# Altium PCB Board Sensor - Part2.PcbDoc
Units mm, origin at the board's own origin, x right, y up, seen from the top; angles counter-clockwise.
Board outline 327 x 231 mm, 2 copper layers (Top Layer, Bottom Layer); 32 components, 0 nets, 152 pads, 0 vias.
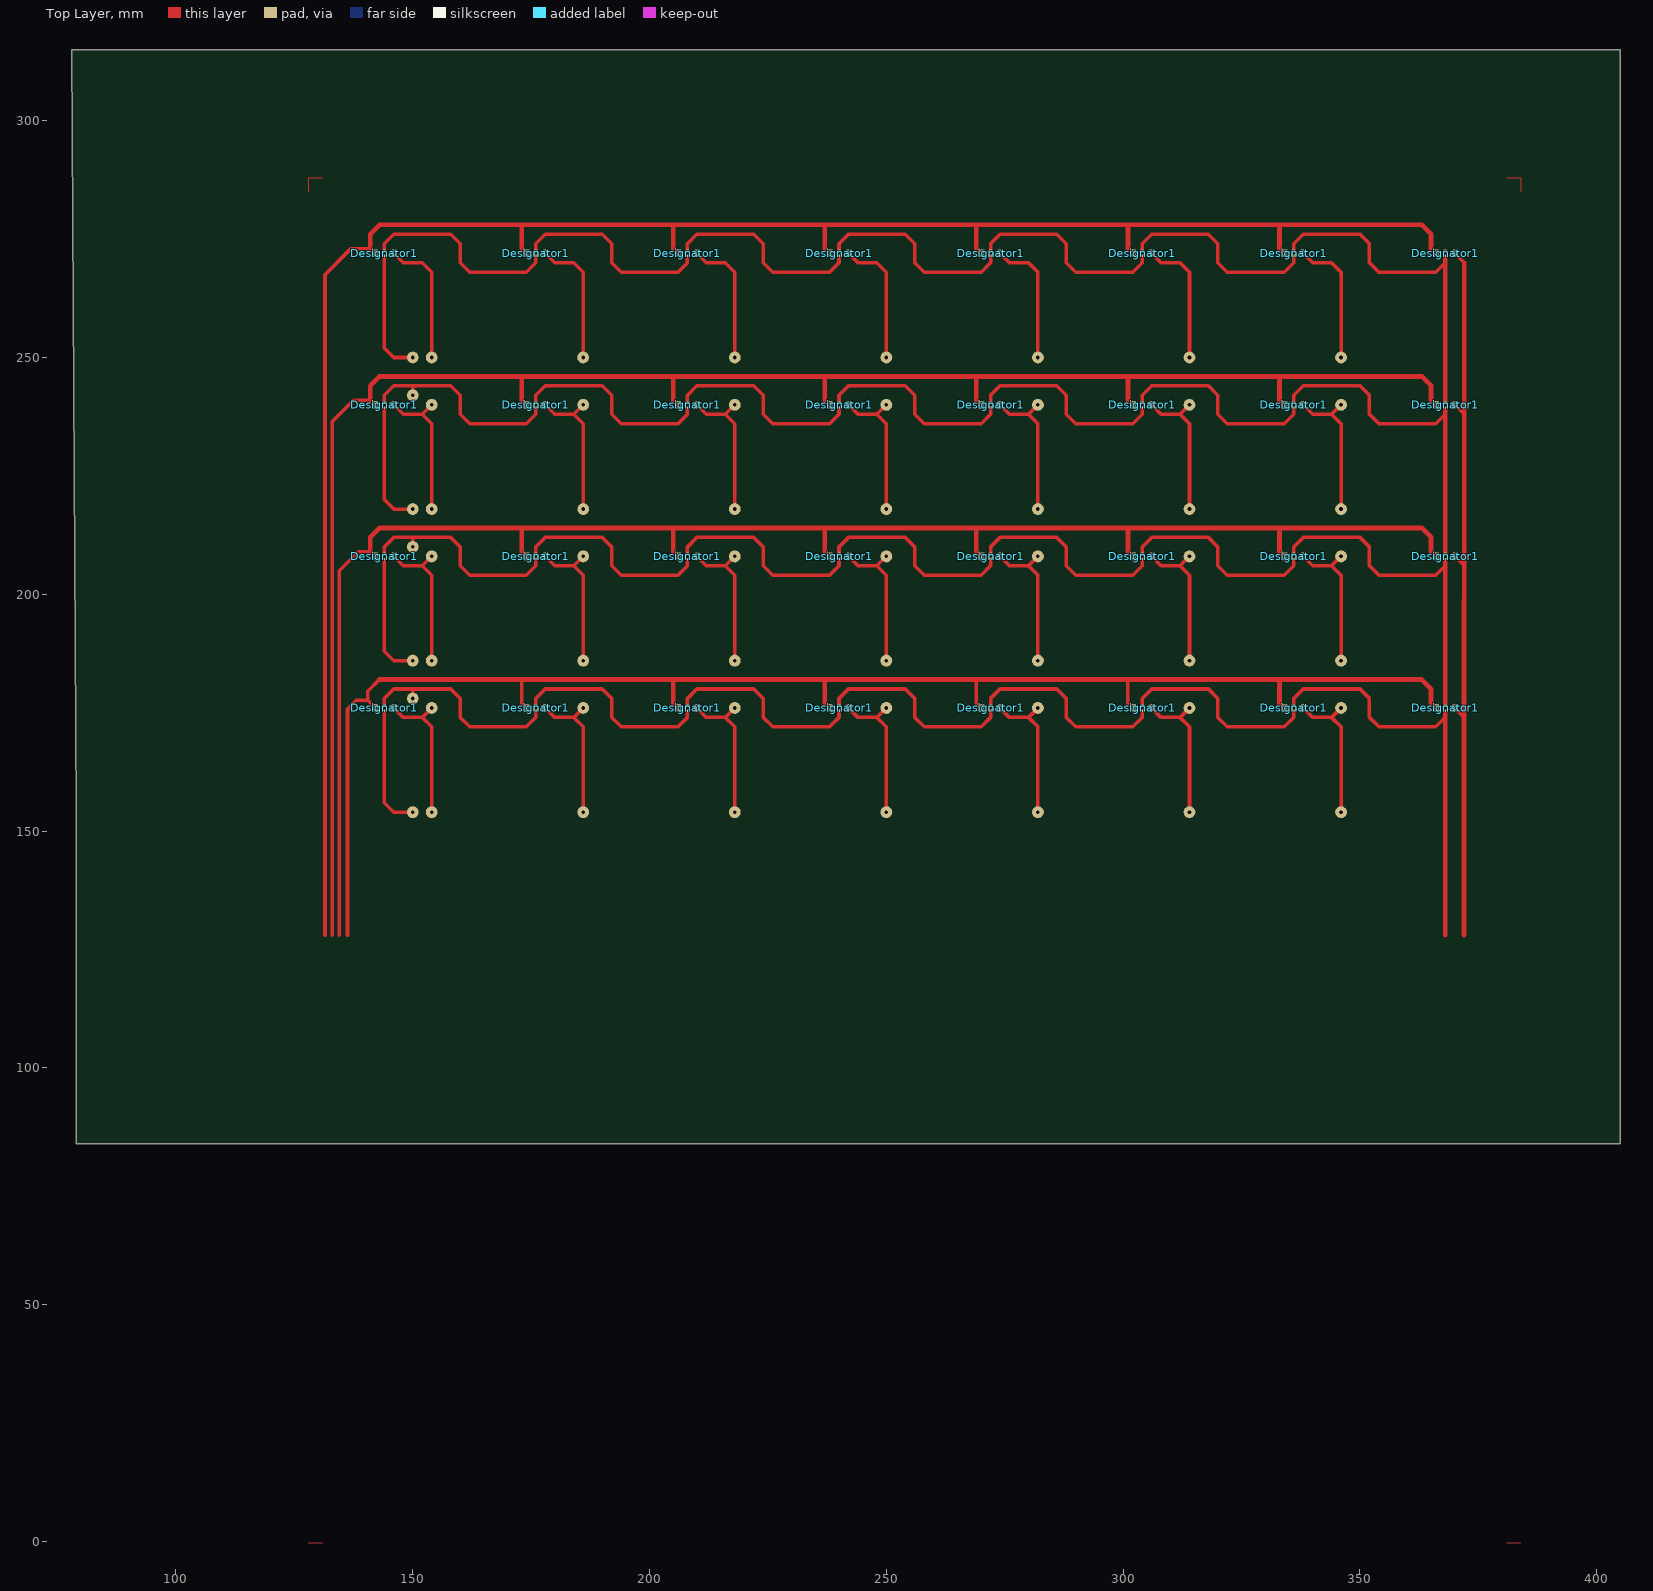
[diagram p0: Top Layer view]
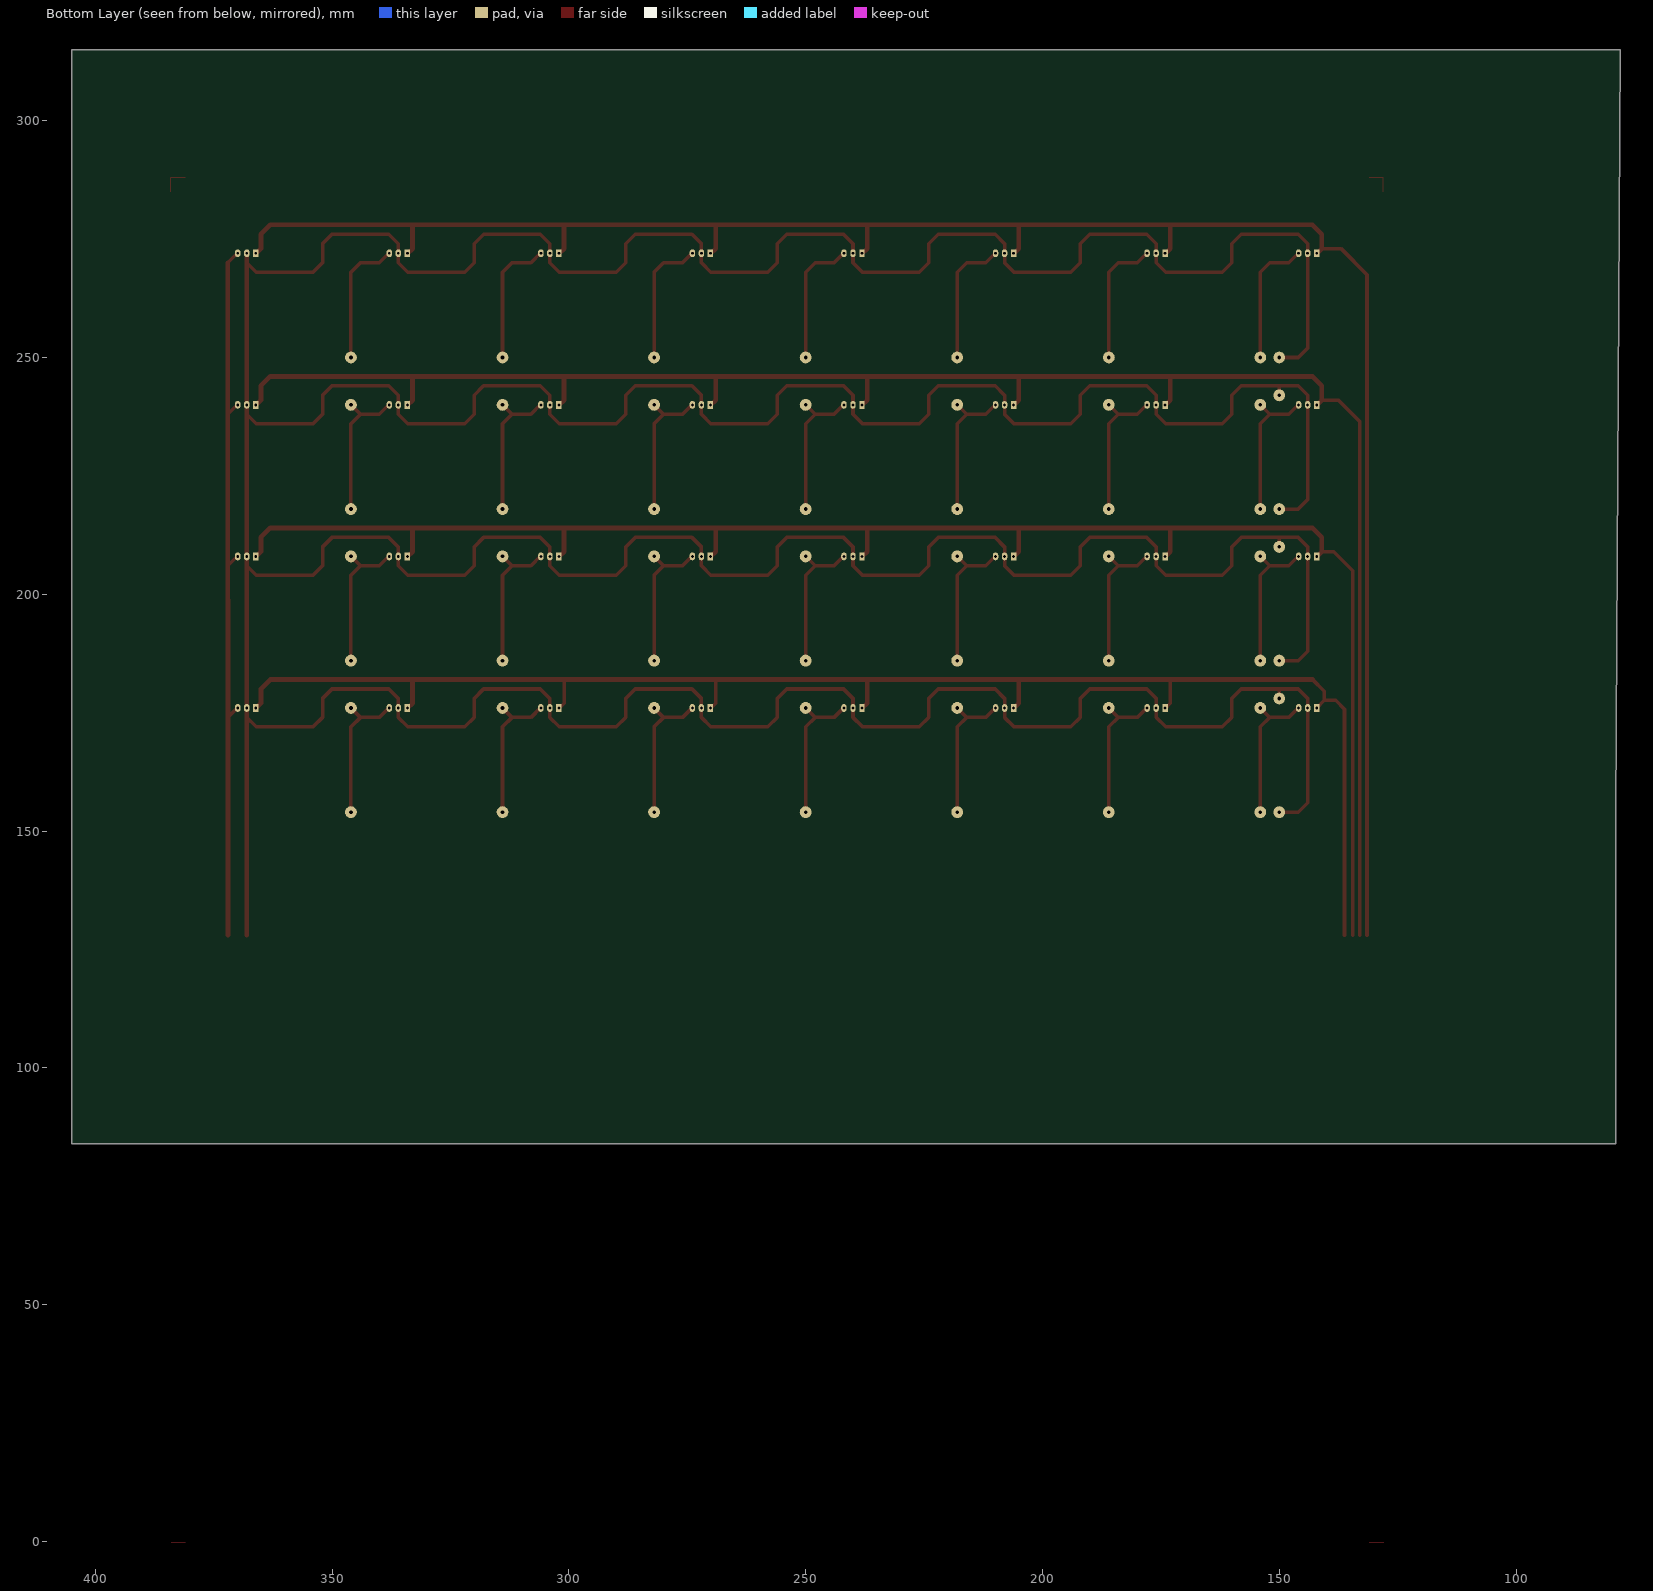
[diagram p1: Bottom Layer view, seen from below]

## Layer stack, top to bottom
Top Layer: signal copper 0.0356
Dielectric: dielectric 0.32, FR-4, Dk 4.8
Bottom Layer: signal copper 0.0356

## Board outline
78,315 405,315 405,84 79,84 79,154

## Design rules (kind name [scope] priority, off if disabled: settings)
Clearance [All] p1: gap=0.254
ComponentClearance [All] p1: gap=0.254 collisioncheckmode=0
PolygonConnect [All] p1: connectstyle=Relief reliefconductorwidth=0.254 reliefentries=4 polygonreliefangle="90 Angle"
RoutingLayers [All] p1: top layer=Horizontal bottom layer=Vertical
RoutingVias [All] p1: holewidth=0.711 width=1.27 viastyle="Through Hole" minholewidth=0.711 minwidth=1.27 maxholewidth=0.711 maxwidth=1.27
SolderMaskExpansion [All] p1: expansion=0.102
TestPointUsage [All] p1: valid=0 allowmultiple=FALSE
Testpoint [All] p1: side=15 testpointundercomponent=TRUE minsize=1.016 maxsize=2.54 preferedsize=1.524 minholesize=0 maxholesize=1.016 preferedholesize=0.813 testpointgrid=0.025 style=1023 order=-539222988
Width [All] p1: maxlimit=5 minlimit=0.254 preferedwidth=0.254 toplayer_prefwidth=0.75 bottomlayer_prefwidth=0.75 minimp=50.000000 maximp=50.000000 favimp=50.000000
16 further rules are at their usual default settings.

## Components (designator, comment, footprint, x,y, rotation, side; value= is the part's Value field where it differs from the comment)
Designator1 "Comment" "PCBComponent_1 - duplicate" 368.023,176 r0 top
Designator1 "Comment" "PCBComponent_1 - duplicate" 336.023,176 r0 top
Designator1 "Comment" "PCBComponent_1 - duplicate" 304.023,176 r0 top
Designator1 "Comment" "PCBComponent_1 - duplicate" 272.023,176 r0 top
Designator1 "Comment" "PCBComponent_1 - duplicate" 240.023,176 r0 top
Designator1 "Comment" "PCBComponent_1 - duplicate" 208.023,176 r0 top
Designator1 "Comment" "PCBComponent_1 - duplicate" 176.023,176 r0 top
Designator1 "Comment" "PCBComponent_1 - duplicate" 144.023,176 r0 top
Designator1 "Comment" "PCBComponent_1 - duplicate" 304.023,272 r0 top
Designator1 "Comment" "PCBComponent_1 - duplicate" 272.023,272 r0 top
Designator1 "Comment" "PCBComponent_1 - duplicate" 240.023,272 r0 top
Designator1 "Comment" "PCBComponent_1 - duplicate" 208.023,272 r0 top
Designator1 "Comment" "PCBComponent_1 - duplicate" 176.023,272 r0 top
Designator1 "Comment" "PCBComponent_1 - duplicate" 144.023,272 r0 top
Designator1 "Comment" "PCBComponent_1 - duplicate" 144.023,240 r0 top
Designator1 "Comment" "PCBComponent_1 - duplicate" 176.023,240 r0 top
Designator1 "Comment" "PCBComponent_1 - duplicate" 208.023,240 r0 top
Designator1 "Comment" "PCBComponent_1 - duplicate" 240.023,240 r0 top
Designator1 "Comment" "PCBComponent_1 - duplicate" 272.023,240 r0 top
Designator1 "Comment" "PCBComponent_1 - duplicate" 304.023,240 r0 top
Designator1 "Comment" "PCBComponent_1 - duplicate" 336.023,240 r0 top
Designator1 "Comment" "PCBComponent_1 - duplicate" 368.023,240 r0 top
Designator1 "Comment" "PCBComponent_1 - duplicate" 336.023,272 r0 top
Designator1 "Comment" "PCBComponent_1 - duplicate" 368.023,272 r0 top
Designator1 "Comment" "PCBComponent_1 - duplicate" 368.023,208 r0 top
Designator1 "Comment" "PCBComponent_1 - duplicate" 336.023,208 r0 top
Designator1 "Comment" "PCBComponent_1 - duplicate" 304.023,208 r0 top
Designator1 "Comment" "PCBComponent_1 - duplicate" 272.023,208 r0 top
Designator1 "Comment" "PCBComponent_1 - duplicate" 240.023,208 r0 top
Designator1 "Comment" "PCBComponent_1 - duplicate" 208.023,208 r0 top
Designator1 "Comment" "PCBComponent_1 - duplicate" 176.023,208 r0 top
Designator1 "Comment" "PCBComponent_1 - duplicate" 144.023,208 r0 top

## Footprints (in the part's own frame and the unit in brackets; to place one, negate y for a bottom-side part, rotate by r counter-clockwise, add the part's x,y. Pads: shape width x height; smd on the part's side, far side on the other; paste and mask are expansions set on the pad)
"PCBComponent_1 - duplicate" [mm]
  rect 1.15x1.65 hole 0.6: 1(-1.905,0)
  oval 1.15x1.65 hole 0.6: 2(0,0) 3(1.905,0)

## Free pads (board coordinates)
  round 2.5 hole 0.762: 9(150.023,154) 9(150.023,178) 9(150.023,186) 9(150.023,210) 9(150.023,218) 9(150.023,242) 9(150.023,250) 9(154.023,176) 9(154.023,208) 9(186.023,176) 9(186.023,208) 9(186.023,240) 9(218.023,176) 9(218.023,208) 9(218.023,240) 9(250.023,176) 9(250.023,208) 9(250.023,240) 9(282.023,176) 9(282.023,208) 9(282.023,240) 9(314.023,176) 9(314.023,208) 9(314.023,240) 9(346.023,176) 9(346.023,208) 9(346.023,240) 10(154.023,154) 10(154.023,186) 10(154.023,250) 10(186,250) 10(186.023,154) 10(186.023,186) 10(186.023,218) 10(218.023,154) 10(218.023,186) 10(218.023,218) 10(218.023,250) 10(250.023,154) 10(250.023,186) 10(250.023,218) 10(250.023,250) 10(282.023,154) 10(282.023,186) 10(282.023,218) 10(282.023,250) 10(314.023,154) 10(314.023,186) 10(314.023,218) 10(314.023,250) 10(346.023,154) 10(346.023,186) 10(346.023,218) 10(346.023,250) 11(154.023,240) 12(154.023,218)

## Nets (pads, with @x,y where several pads share a name; then routed paths per layer and width w, separated by ;. In a path a pad name is that pad's centre, name@x,y a point inside that pad or via, vN(x,y) a via of type N, cw(c..) or ccw(c..) an arc to the next point about the centre after c; other vN are vias at no path point)
pads on no net: Designator1.1 Designator1.2 Designator1.3
copper on no net: | length 3966.7
  Top Layer w0.254: 128,-0.25 131,-0.25 ; 128.023,285 128.023,288 131.023,288 ; 140.368,177.618 140.5,177.618 ; 143,182 143.023,182 ; 381,-0.25 384,-0.25 ; 381.023,288 384.023,288 384.023,285
  Top Layer w0.75: 131.5,128 131.5,267.5 137,273 141.023,273 ; 133,128 133,236.5 137.5,241 141.023,241 ; 134.5,128 134.5,205 138.5,209 141.023,209 ; 136.25,128 136.25,175.75 138.118,177.618 140.5,177.618 ; 142.118,176 140.5,177.618 ; 143,182 140.5,179.5 140.5,177.618 ; 146.023,176 148.023,174 152.023,174 ; 146.023,208 148.023,206 152.023,206 ; 146.023,240 148.023,238 152.023,238 ; 146.023,272 148.023,270 152.023,270 154.023,268 154.023,250 ; 150.023,154 146.023,154 144.023,156 144.023,176 144.023,178 146.023,180 158.023,180 160.023,178 160.023,174 162.023,172 174.023,172 176.023,174 176.023,176 176.023,178 178.023,180 190.023,180 192.023,178 192.023,174 194.023,172 206.023,172 208.023,174 208.023,176 208.023,178 210.023,180 222.023,180 224.023,178 224.023,174 226.023,172 238.023,172 240.023,174 240.023,178 242.023,180 254.023,180 256.023,178 256.023,174 258.023,172 270.023,172 272.023,174 272.023,178 274.023,180 286.023,180 288.023,178 288.023,177 288.023,174 290.023,172 302.023,172 304.023,174 304.023,176 304.023,178 306.023,180 318.023,180 320.023,178 320.023,174 322.023,172 334.023,172 336.023,174 336.023,178 338.023,180 350.023,180 352.023,178 352.023,174 354.023,172 366.023,172 368.023,174 ; 150.023,178 150.023,180 ; 150.023,186 146.023,186 144.023,188 144.023,208 144.023,210 146.023,212 158.023,212 160.023,210 160.023,206 162.023,204 174.023,204 176.023,206 176.023,208 176.023,210 178.023,212 190.023,212 192.023,210 192.023,206 194.023,204 206.023,204 208.023,206 208.023,208 208.023,210 210.023,212 222.023,212 224.023,210 224.023,206 226.023,204 238.023,204 240.023,206 240.023,210 242.023,212 254.023,212 256.023,210 256.023,206 258.023,204 270.023,204 272.023,206 272.023,210 274.023,212 286.023,212 288.023,210 288.023,206 290.023,204 302.023,204 304.023,206 304.023,208 304.023,210 306.023,212 318.023,212 320.023,210 320.023,206 322.023,204 334.023,204 336.023,206 336.023,210 338.023,212 350.023,212 352.023,210 352.023,206 354.023,204 366.023,204 368.023,206 ; 150.023,210 150.023,212 ; 150.023,218 146.023,218 144.023,220 144.023,240 144.023,242 146.023,244 158.023,244 160.023,242 160.023,238 162.023,236 174.023,236 176.023,238 176.023,240 176.023,242 178.023,244 190.023,244 192.023,242 192.023,238 194.023,236 206.023,236 208.023,238 208.023,240 208.023,242 210.023,244 222.023,244 224.023,242 224.023,238 226.023,236 238.023,236 240.023,238 240.023,242 242.023,244 254.023,244 256.023,242 256.023,238 258.023,236 270.023,236 272.023,238 272.023,242 274.023,244 286.023,244 288.023,242 ; 150.023,242 150.023,244 ; 150.023,250 146.023,250 144.023,252 144.023,272 144.023,274 146.023,276 158.023,276 160.023,274 160.023,270 162.023,268 174.023,268 176.023,270 176.023,272 176.023,274 178.023,276 190.023,276 192.023,274 192.023,270 194.023,268 206.023,268 208.023,270 208.023,272 208.023,274 210.023,276 222.023,276 224.023,274 224.023,270 226.023,268 238.023,268 240.023,270 240.023,274 242.023,276 254.023,276 256.023,274 256.023,270 258.023,268 270.023,268 272.023,270 272.023,274 274.023,276 286.023,276 288.023,274 ; 154.023,154 154.023,172 152.023,174 ; 154.023,176 152.023,174 ; 154.023,186 154.023,204 152.023,206 ; 154.023,208 152.023,206 ; 154.023,218 154.023,234 154.023,236 152.023,238 ; 154.023,240 152.023,238 ; 173.023,181.949 173.023,177 174.023,176 ; 178.023,176 180.023,174 184.023,174 ; 178.023,208 180.023,206 184.023,206 ; 178.023,240 180.023,238 184.023,238 ; 178.023,272 180.023,270 184.023,270 186.023,268 186.023,250 ; 186.023,154 186.023,172 184.023,174 ; 186.023,176 184.023,174 ; 186.023,186 186.023,204 184.023,206 ; 186.023,208 184.023,206 ; 186.023,218 186.023,236 184.023,238 ; 186.023,240 184.023,238 ; 210.023,176 212.023,174 216.023,174 ; 210.023,208 212.023,206 216.023,206 ; 210.023,240 212.023,238 216.023,238 ; 210.023,272 212.023,270 216.023,270 218.023,268 218.023,250 ; 218.023,154 218.023,172 216.023,174 ; 218.023,176 216.023,174 ; 218.023,186 218.023,204 216.023,206 ; 218.023,208 216.023,206 ; 218.023,218 218.023,236 216.023,238 ; 218.023,240 216.023,238 ; 242.023,176 244.023,174 248.023,174 ; 242.023,208 244.023,206 248.023,206 ; 242.023,240 244.023,238 248.023,238 ; 242.023,272 244.023,270 248.023,270 250.023,268 250.023,250 ; 250.023,154 250.023,172 248.023,174 ; 250.023,176 248.023,174 ; 250.023,186 250.023,204 248.023,206 ; 250.023,208 248.023,206 ; 250.023,218 250.023,236 248.023,238 ; 250.023,240 248.023,238 ; 269.023,181.949 269.023,177 270.023,176 ; 274.023,176 276.023,174 280.023,174 ; 274.023,208 276.023,206 280.023,206 ; 274.023,240 276.023,238 280.023,238 ; 274.023,272 276.023,270 280.023,270 282.023,268 282.023,250 ; 282.023,154 282.023,172 280.023,174 ; 282.023,176 280.023,174 ; 282.023,186 282.023,204 280.023,206 ; 282.023,208 280.023,206 ; 282.023,218 282.023,236 280.023,238 ; 282.023,240 280.023,238 ; 288,242 288,238 290.023,236 302.023,236 304.023,238 304.023,240 304.023,242 306.023,244 318.023,244 320.023,242 320.023,238 322.023,236 334.023,236 336.023,238 336.023,242 338.023,244 350.023,244 352.023,242 352.023,238 354.023,236 366.023,236 368.023,238 ; 288,270 288,274 ; 288.023,270 290.023,268 302.023,268 304.023,270 304.023,272 304.023,274 306.023,276 318.023,276 ; 301.023,182 301.023,177 302.023,176 ; 306.023,176 308.023,174 312.023,174 ; 306.023,208 308.023,206 312.023,206 ; 306.023,240 308.023,238 312.023,238 ; 306.023,272 308.023,270 312.023,270 314.023,268 314.023,250 ; 314.023,154 314.023,172 312.023,174 ; 314.023,176 312.023,174 ; 314.023,186 314.023,204 312.023,206 ; 314.023,208 312.023,206 ; 314.023,218 314.023,236 312.023,238 ; 314.023,240 312.023,238 ; 318,276 320,274 320,270 ; 320.023,270 322.023,268 334.023,268 336.023,270 336.023,274 338.023,276 350.023,276 352.023,274 352.023,270 354.023,268 366.023,268 368.023,270 ; 338.023,176 340.023,174 344.023,174 ; 338.023,208 340.023,206 344.023,206 ; 338.023,240 340.023,238 344.023,238 ; 338.023,272 340.023,270 344.023,270 346.023,268 346.023,250 ; 346.023,154 346.023,172 344.023,174 ; 346.023,176 344.023,174 ; 346.023,186 346.023,204 344.023,206 ; 346.023,208 344.023,206 ; 346.023,218 346.023,236 344.023,238 ; 346.023,240 344.023,238 ; 370.023,176 372.023,174 ; 370.023,208 372.023,206 ; 370.023,240 372.023,238 ; 370.023,272 372.023,270
  Top Layer w1: 142.023,208 141.023,209 141.023,212 143.023,214 363.023,214 365.023,212 365.023,209 366.023,208 ; 142.023,240 141.023,241 141.023,244 143.023,246 363.023,246 365.023,244 365.023,241 366.023,240 ; 142.023,272 141.023,273 141.023,276 143.023,278 363.023,278 365.023,276 365.023,273 366.023,272 ; 143.023,182 363.023,182 365.023,180 365.023,177 366.023,176 ; 173.023,213.949 173.023,209 174.023,208 ; 173.023,245.949 173.023,241 174.023,240 ; 173.023,277.949 173.023,273 174.023,272 ; 205.023,182 205.023,177 206.023,176 ; 205.023,214 205.023,209 206.023,208 ; 205.023,246 205.023,241 206.023,240 ; 205.023,278 205.023,273 206.023,272 ; 237.023,181.949 237.023,177 238.023,176 ; 237.023,213.949 237.023,209 238.023,208 ; 237.023,245.949 237.023,241 238.023,240 ; 237.023,277.949 237.023,273 238.023,272 ; 269.023,213.949 269.023,209 270.023,208 ; 269.023,245.949 269.023,241 270.023,240 ; 269.023,277.949 269.023,273 270.023,272 ; 301.023,214 301.023,209 302.023,208 ; 301.023,246 301.023,241 302.023,240 ; 301.023,278 301.023,273 302.023,272 ; 333.023,182 333.023,177 334.023,176 ; 333.023,214 333.023,209 334.023,208 ; 333.023,246 333.023,241 334.023,240 ; 333.023,278 333.023,273 334.023,272 ; 368,128 368.023,272 ; 372,128 372.023,270